# EAGLE board uno (EAGLE 6.1)
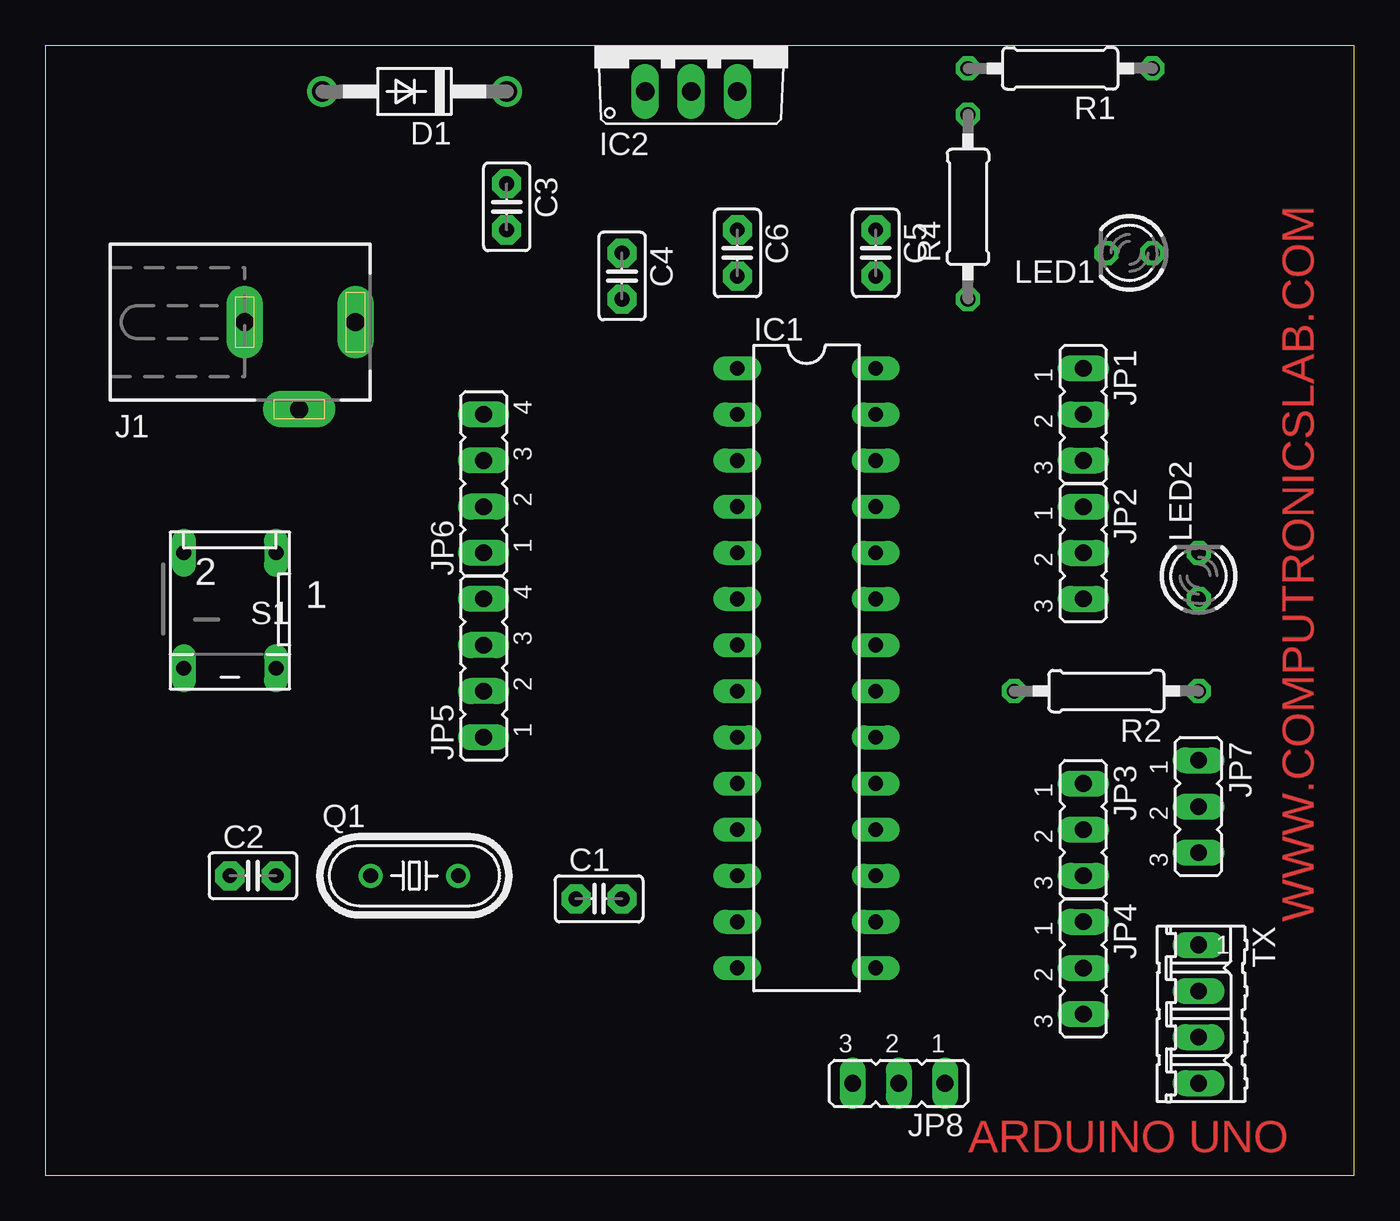
[diagram p0: board, top side]
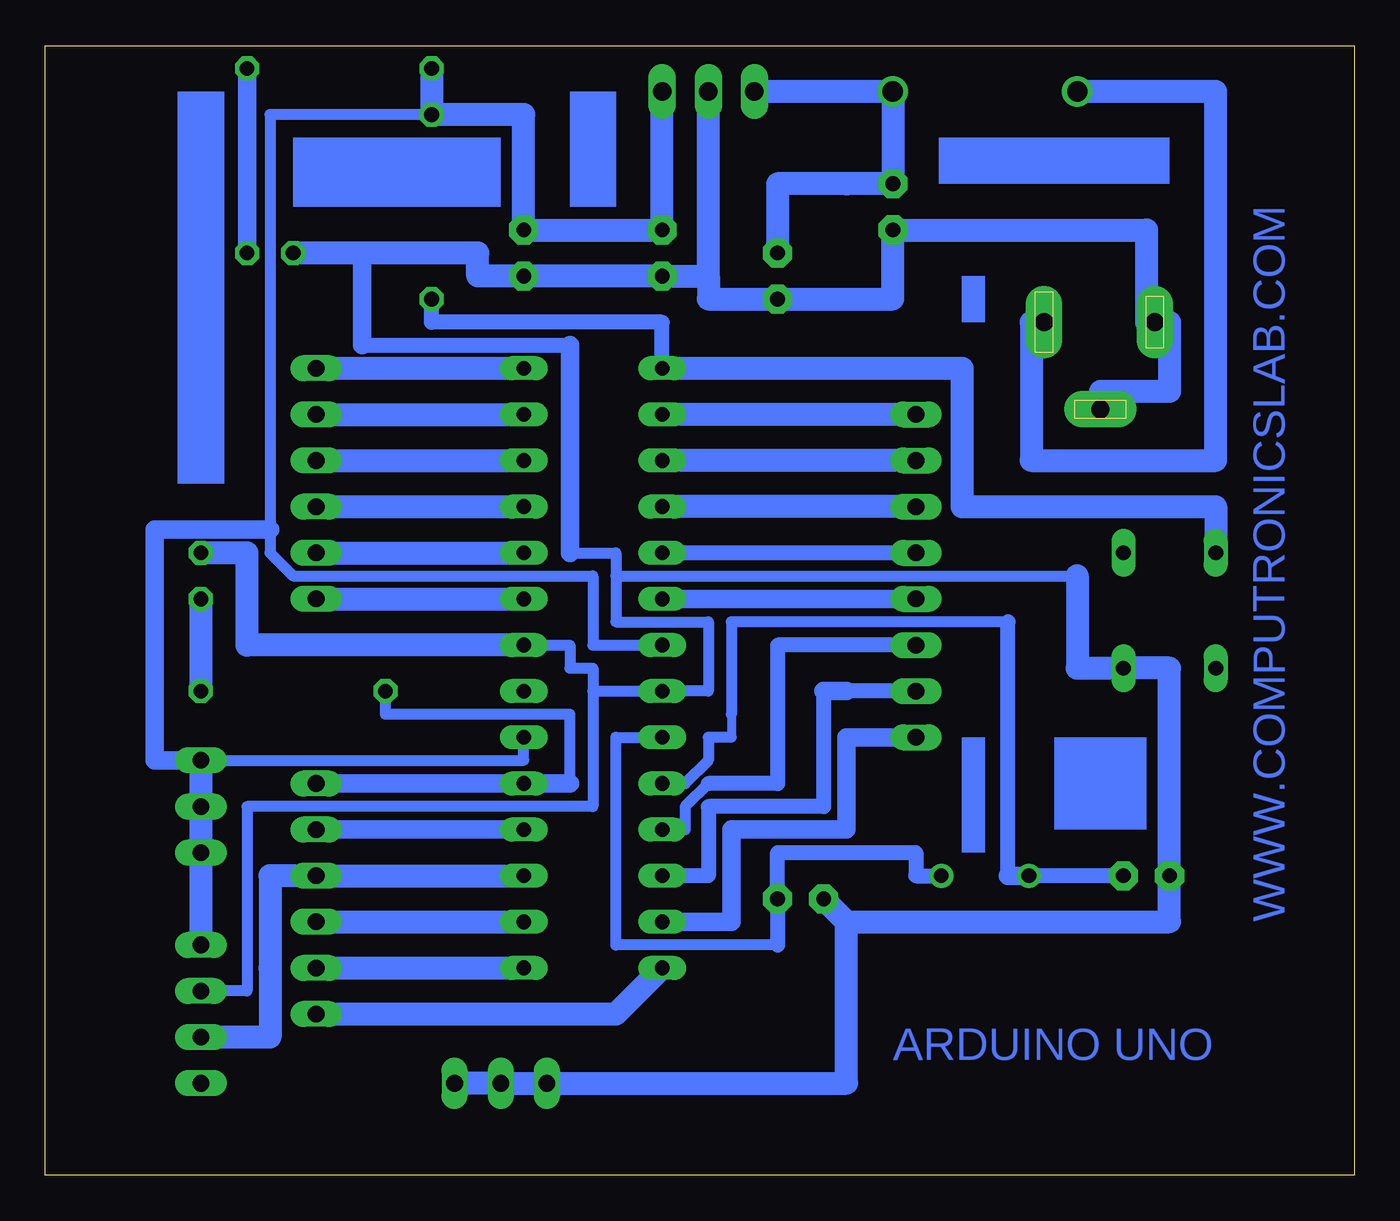
[diagram p1: board, bottom side, seen from below]

Size 72.06 x 62.22 mm. Coordinates in mm from the lower left corner, seen from the top.
Outline: 0,0 72.06,0 72.06,62.22 0,62.22 0,0
Copper layers (1*16): Top 0.035mm / dielectric 1.5mm / Bottom 0.035mm
Design rules: minimum track width 20mil, minimum drill 24mil, track to track 8mil, track to pad 8mil, pad to pad 8mil, via to via 8mil, smd to smd 8mil, copper to edge 40mil, drill to drill 8mil, minimum pad ring 10mil, minimum via ring 8mil, stop-mask expansion 4mil, vias tented up to drill 0mil, thermal gap 10mil

## Footprints (pad centres in the part's own frame; a part is rotated, then mirrored left to right if it is on the bottom)
C2.5-2 = drill 0.813 pad 1.6 octagon: 1 -1.27,0; 2 1.27,0
DO41-10 = drill 1.118: A 5.08,0; C -5.08,0
DIL28-3 = drill 0.813 long: 1 -16.51,-3.81; 2 -13.97,-3.81; 3 -11.43,-3.81; 4 -8.89,-3.81; 5 -6.35,-3.81; 6 -3.81,-3.81; 7 -1.27,-3.81; 8 1.27,-3.81; 9 3.81,-3.81; 10 6.35,-3.81; 11 8.89,-3.81; 12 11.43,-3.81; 13 13.97,-3.81; 14 16.51,-3.81; 15 16.51,3.81; 16 13.97,3.81; 17 11.43,3.81; 18 8.89,3.81; 19 6.35,3.81; 20 3.81,3.81; 21 1.27,3.81; 22 -1.27,3.81; 23 -3.81,3.81; 24 -6.35,3.81; 25 -8.89,3.81; 26 -11.43,3.81; 27 -13.97,3.81; 28 -16.51,3.81
TO220V = drill 1.016 long: 1 -2.54,-2.54; 2 0,-2.54; 3 2.54,-2.54
DCJ0303 = drill 1 pad 2 long: 1 0,3.1; 2 4.8,0; 3 0,-3
JP2 = drill 0.914 long: 1 -2.54,0; 2 0,0; 3 2.54,0
JP4 = drill 0.914 long: 1 -3.81,0; 2 -1.27,0; 3 1.27,0; 4 3.81,0
LED3MM = drill 0.813 octagon: A -1.27,0; K 1.27,0
HC49/S = drill 0.813: 1 -2.413,0; 2 2.413,0
0207/10 = drill 0.813 octagon: 1 -5.08,0; 2 5.08,0
DP-02 = drill 0.813 long: 1 -2.54,-2.54; 2 2.54,-2.54; 3 2.54,3.81; 4 -2.54,3.81
04P = drill 0.914 long: 1 -3.81,0; 2 -1.27,0; 3 1.27,0; 4 3.81,0

## Placement (x,y rotation side)
C1  22pf  [C2.5-2]  30.48,15.24 0 top
C2  22pf  [C2.5-2]  11.43,16.51 0 top
C3  470uF  [C2.5-2]  25.4,53.34 270 top
C4  0.1uf  [C2.5-2]  31.75,49.53 270 top
C5  0.1uf  [C2.5-2]  45.72,50.8 270 top
C6  4.7uf  [C2.5-2]  38.1,50.8 270 top
D1  1N4007  [DO41-10]  20.32,59.69 180 top
IC1  ATMEGA328  [DIL28-3]  41.91,27.94 270 top
IC2  7805  [TO220V]  35.56,62.23 0 top
J1  [DCJ0303]  13.97,46.99 270 top
JP1  3 pin  [JP2]  57.15,41.91 270 top
JP2  3 pin  [JP2]  57.15,34.29 270 top
JP3  3 pin  [JP2]  57.15,19.05 270 top
JP4  3 pin  [JP2]  57.15,11.43 270 top
JP5  4 pin  [JP4]  24.13,27.94 90 top
JP6  4 pin  [JP4]  24.13,38.1 90 top
JP7  [JP2]  63.5,20.32 270 top
JP8  [JP2]  46.99,5.08 180 top
LED1  3mm  [LED3MM]  59.69,50.8 180 top
LED2  3mm  [LED3MM]  63.5,33.02 90 top
Q1  16MHZ  [HC49/S]  20.32,16.51 0 top
R1  220R  [0207/10]  55.88,60.96 180 top
R2  330R  [0207/10]  58.42,26.67 180 top
R4  10K  [0207/10]  50.8,53.34 90 top
S1  push switch  [DP-02]  10.16,31.75 180 top
TX  [04P]  63.5,8.89 270 top

## Library data of the parts
C1-C6 = capacitor-wima
D1 = diode
IC1 = quantum-research-group; OC_FARNELL: unknown; OC_NEWARK: unknown
IC2 = linear
J1 = con-jack; OC_FARNELL: unknown; OC_NEWARK: unknown
JP1-JP8 = jumper
LED1 LED2 = led
Q1 = crystal; OC_FARNELL: 1667008; OC_NEWARK: unknown
R1 R2 R4 = rcl
S1 = switch-dil; MPN: MCDP02; OC_FARNELL: 1255233; OC_NEWARK: 26M1095
TX = con-amp-quick; OC_FARNELL: unknown; OC_NEWARK: unknown

## Nets
N$1: C1.2 IC1.9 Q1.2
N$2: C2.2 IC1.10 Q1.1
N$3: D1.A J1.1
N$4: C5.1 C6.1 IC1.7 IC1.20 IC2.3 JP7.1 JP7.2 JP7.3 R1.2 R4.2 TX.1
N$5: C1.1 C2.1 C3.2 C4.2 C5.2 C6.2 IC1.8 IC1.22 IC2.2 J1.2 J1.3 JP8.1 JP8.2 JP8.3 LED1.K LED2.K S1.4 TX.2
N$6: LED1.A R1.1
N$7: C3.1 C4.1 D1.C IC2.1
N$8: IC1.28 JP1.1
N$9: IC1.27 JP1.2
N$10: IC1.26 JP1.3
N$11: IC1.25 JP2.1
N$12: IC1.24 JP2.2
N$13: IC1.23 JP2.3
N$14: IC1.5 JP6.1
N$15: IC1.2 JP6.4
N$16: IC1.3 JP6.3
N$17: IC1.4 JP6.2
N$18: IC1.6 JP5.4
N$19: IC1.12 JP5.2
N$20: IC1.11 JP5.3
N$22: IC1.14 JP4.3
N$23: IC1.15 JP4.2
N$24: IC1.16 JP4.1
N$25: IC1.17 JP3.3 TX.3
N$26: IC1.18 JP3.2
N$27: IC1.19 JP3.1 R2.2
N$29: IC1.13 JP5.1
N$31: IC1.1 R4.1 S1.2
N$32: LED2.A R2.1

## Tracks (layer width: path | path; a pad name or v marks a point on that pad's centre or on a via)
N$1
  Bottom 0.61: IC1.9 40.64,24.13 40.64,12.7 31.75,12.7
  Bottom 0.813: Q1.2 24.13,16.51 24.13,17.78 31.75,17.78 C1.2 31.75,12.7
N$2
  Bottom 0.508: 34.29,25.4 34.29,24.13
  Bottom 0.61: 34.29,25.4 34.29,30.48 19.05,30.48 | 34.29,24.13 35.56,24.13 35.56,22.86 36.83,21.59 IC1.10
  Bottom 0.813: C2.2 Q1.1 | 19.05,16.51 19.05,30.48
  Bottom 1.016: 19.05,16.51 Q1.1
N$3
  Bottom 1.27: D1.A 7.62,59.69 7.62,39.37 17.78,39.37 17.78,46.99 J1.1
N$4
  Bottom 0.61: IC1.20 45.72,22.86 JP7.1 | IC1.7 41.91,29.21 41.91,33.02 58.42,33.02 59.69,34.29 59.69,35.56 59.69,58.42 45.72,58.42
  Bottom 1.016: JP7.1 66.04,22.86 66.04,35.56 59.69,35.56
  Bottom 1.27: TX.1 JP7.3 JP7.2 JP7.1 | IC2.3 C6.1 C5.1 45.72,58.42 R4.2 R1.2
N$5
  Bottom 0.61: 41.91,26.67 41.91,27.94 43.18,27.94 43.18,29.21 IC1.22 | 41.91,26.67 IC1.8 35.56,26.67 35.56,30.48 40.64,30.48 40.64,33.02 | TX.2 60.96,10.16 60.96,20.32 41.91,20.32 41.91,26.67 | 43.18,34.29 40.64,34.29 40.64,33.02 | 40.64,33.02 15.24,33.02
  Bottom 0.813: 54.61,45.72 43.18,45.72
  Bottom 1.016: 43.18,45.72 43.18,34.29 | 54.61,50.8 54.61,45.72
  Bottom 1.27: JP8.1 JP8.2 JP8.3 27.94,5.08 27.94,13.97 | C1.1 27.94,13.97 | 27.94,13.97 10.16,13.97 C2.1 10.16,27.94 S1.4 15.24,27.94 15.24,33.02 | LED2.K 60.96,34.29 60.96,29.21 IC1.22 | J1.2 13.97,43.18 10.16,43.18 10.16,46.99 J1.3 11.43,46.99 11.43,52.07 C3.2 25.4,48.26 C4.2 35.56,48.26 35.56,49.53 | 35.56,49.53 IC2.2 | 35.56,49.53 C6.2 C5.2 48.26,49.53 48.26,50.8 54.61,50.8 LED1.K
N$6
  Bottom 1.016: R1.1 LED1.A
N$7
  Bottom 1.27: IC2.1 D1.C C3.1 27.94,54.61 31.75,54.61 31.75,53.34 C4.1
N$8
  Bottom 1.27: JP1.1 IC1.28
N$9
  Bottom 1.27: JP1.2 IC1.27
N$10
  Bottom 1.27: JP1.3 IC1.26
N$11
  Bottom 1.27: JP2.1 IC1.25
N$12
  Bottom 1.27: JP2.2 IC1.24
N$13
  Bottom 1.27: JP2.3 IC1.23
N$14
  Bottom 0.813: JP6.1 IC1.5
N$15
  Bottom 1.27: JP6.4 IC1.2
N$16
  Bottom 1.27: JP6.3 IC1.3
N$17
  Bottom 1.27: JP6.2 IC1.4
N$18
  Bottom 1.016: JP5.4 IC1.6
N$19
  Bottom 0.813: 29.21,26.67 29.21,20.32 35.56,20.32 35.56,16.51 IC1.12 | JP5.2 27.94,26.67
  Bottom 1.016: 27.94,26.67 29.21,26.67
N$20
  Bottom 0.61: 35.56,21.59 36.83,20.32 36.83,19.05 IC1.11
  Bottom 0.813: 35.56,21.59 31.75,21.59 31.75,29.21 JP5.3
N$22
  Bottom 1.27: IC1.14 40.64,8.89 JP4.3
N$23
  Bottom 1.27: JP4.2 IC1.15
N$24
  Bottom 1.27: JP4.1 IC1.16
N$25
  Bottom 1.27: IC1.17 JP3.3 59.69,16.51 59.69,11.43 59.69,7.62 TX.3
N$26
  Bottom 1.016: JP3.2 IC1.18
N$27
  Bottom 0.61: R2.2 53.34,25.4 52.07,25.4 44.45,25.4 43.18,25.4 43.18,24.13 43.18,21.59
  Bottom 1.016: JP3.1 IC1.19 43.18,21.59
N$29
  Bottom 1.016: IC1.13 34.29,13.97 34.29,19.05 33.02,19.05 27.94,19.05 27.94,24.13 JP5.1
N$31
  Bottom 0.813: R4.1 50.8,46.99 38.1,46.99 IC1.1
  Bottom 1.27: S1.2 7.62,36.83 21.59,36.83 21.59,44.45 IC1.1
N$32
  Bottom 1.27: LED2.A R2.1
(copper drawn outside any net)
  shapes: Bottom area x7

## Text on the board
Top: WWW.COMPUTRONICSLAB.COM | ARDUINO UNO
Bottom: WWW.COMPUTRONICSLAB.COM | ARDUINO UNO